# EAGLE board RADiuS-DSMA (EAGLE 7.7.0)
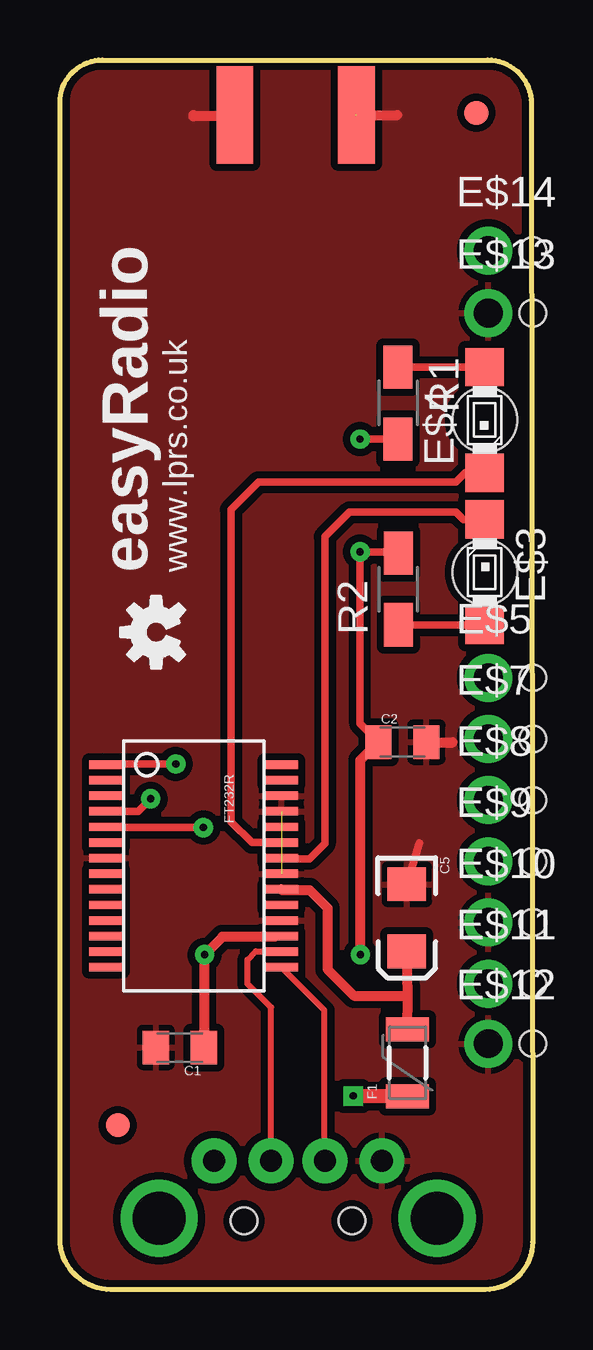
[diagram p0: board, top side]
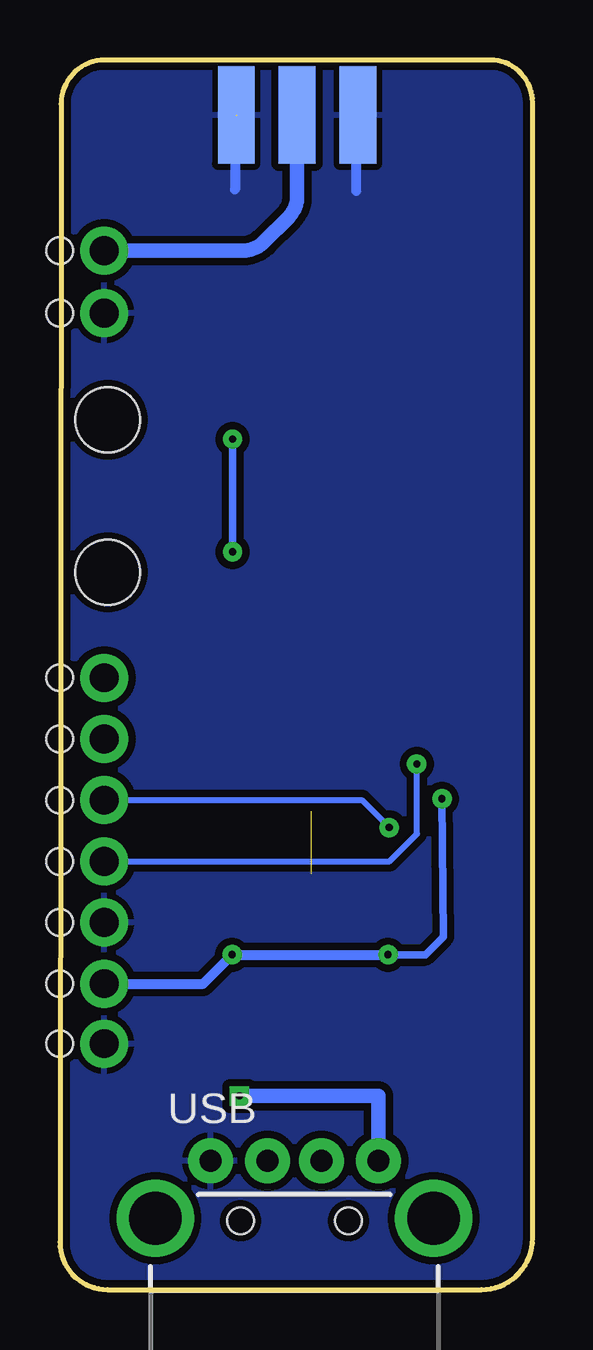
[diagram p1: board, bottom side, seen from below]

Size 19.71 x 51.25 mm. Coordinates in mm from the lower left corner, seen from the top.
Outline: 19.66,49.42 19.71,1.98 arc-90 17.73,0 2.13,0 arc-90 0,2.13 0,49.48 arc-90 1.77,51.25 17.84,51.25 arc-90 19.66,49.42
Copper layers (1*16): Top 0.035mm / dielectric 1.5mm / Bottom 0.035mm
Design rules "default *": minimum track width 8mil, minimum drill 20mil, track to track 8mil, track to pad 8mil, pad to pad 8mil, via to via 8mil, smd to smd 8mil, copper to edge 10mil, drill to drill 8mil, minimum pad ring 12mil, minimum via ring 10mil, stop-mask expansion 4mil, vias tented up to drill 0.3mm, thermal gap 10mil
Net classes: 0 default: width 0.203 mm; 1 power: width 0.254 mm
Holes 1.1 mm at 19.71,43.3 19.71,40.7 19.71,25.5 19.71,22.95 19.71,20.4 19.71,17.85 19.71,15.3 19.71,12.75 19.71,10.25

## Footprints (pad centres in the part's own frame; a part is rotated, then mirrored left to right if it is on the bottom)
C0805K = smd 1.1 x 1.4: 1 -1,0; 2 1,0
EIA3216 = smd 1.4 x 1.6: A 1.4,0; C -1.4,0
FIDUCIAL = smd 1 x 1: 1 0,0
MINI-TOPLED-SANTANA = smd 1.6 x 1.6: A 0,2.2; C 0,-2.2 | hole 2.7: 0,0
1X01-CLEANBIG = drill 1.2 pad 2: 1 0,0
PTC-1206 = smd 1 x 1.8: 1 -1.4,0; 2 1.4,0
SSOP28DB = smd 0.348 x 1.397: 1 -4.225,-3.656; 2 -3.575,-3.656; 3 -2.925,-3.656; 4 -2.275,-3.656; 5 -1.625,-3.656; 6 -0.975,-3.656; 7 -0.325,-3.656; 8 0.325,-3.656; 9 0.975,-3.656; 10 1.625,-3.656; 11 2.275,-3.656; 12 2.925,-3.656; 13 3.575,-3.656; 14 4.225,-3.656; 15 4.225,3.656; 16 3.575,3.656; 17 2.925,3.656; 18 2.275,3.656; 19 1.625,3.656; 20 0.975,3.656; 21 0.325,3.656; 22 -0.325,3.656; 23 -0.975,3.656; 24 -1.625,3.656; 25 -2.275,3.656; 26 -2.925,3.656; 27 -3.575,3.656; 28 -4.225,3.656
SMA-EDGE = smd 1.524 x 4.064: GND@0 0,0; GND@1 5.08,0; SIG 2.54,0 | smd 1.524 x 4.064 bottom: GND@2 0,0; GND@3 5.08,0
R1206W = smd 1.8 x 1.2: 1 -1.499,0; 2 1.499,0
USB-A-H = drill 0.914 pad 1.88: D+ 2.4,1.127; D- 2.4,-1.127; GND 2.4,3.5; VBUS 2.4,-3.5 | drill 2.2: GND2 0,-5.8; GND3 0,5.8 | hole 1.1: -0.1,2.25; -0.1,-2.25

## Placement (x,y rotation side)
C1  0.1uF  [C0805K]  5,10.09 180 top
C2  0.1uF  [C0805K]  14.28,22.82 0 top
C5  10uF  [EIA3216]  14.46,15.5 270 top
E$1  [FIDUCIAL]  2.41,6.85 0 top
E$3  [MINI-TOPLED-SANTANA]  17.71,29.9 180 top
E$4  [MINI-TOPLED-SANTANA]  17.71,36.25 0 top
E$5  [1X01-CLEANBIG]  17.86,25.5 0 top
E$6  [OSHW-LOGO-S]  4.01,27.4 90 top
E$7  [1X01-CLEANBIG]  17.86,22.95 0 top
E$8  [1X01-CLEANBIG]  17.86,20.4 0 top
E$9  [1X01-CLEANBIG]  17.86,17.85 0 top
E$10  [1X01-CLEANBIG]  17.86,15.3 0 top
E$11  [1X01-CLEANBIG]  17.86,12.75 0 top
E$12  [1X01-CLEANBIG]  17.86,10.25 0 top
E$13  [1X01-CLEANBIG]  17.86,40.7 0 top
E$14  [1X01-CLEANBIG]  17.86,43.3 0 top
E$15  [FIDUCIAL]  17.36,49.05 0 top
F1  500mA  [PTC-1206]  14.5,9.45 90 top
FT232R  FT232R  [SSOP28DB]  5.58,17.66 270 top
GND  [SMA-EDGE]  12.36,48.95 0 bottom
R1  330  [R1206W]  14.1,36.95 270 top
R2  330  [R1206W]  14.11,29.2 90 top
USB  USBSMD  [USB-A-H]  9.93,2.97 90 bottom

## Library data of the parts
C1 C2 = adafruit
C5 E$1 E$6 E$15 F1 FT232R GND USB = SparkFun
E$3 E$4 = led
E$5 E$7-E$14 = adafruit_4u
R1 R2 = ref-packages

## Nets
3.3V [power]: C1.1 C2.1 E$11.1 FT232R.4 FT232R.17 R1.2 R2.2
ANT: E$14.1 GND.SIG
GND [power]: C1.2 C2.2 C5.C E$10.1 E$12.1 E$13.1 FT232R.7 FT232R.18 FT232R.21 FT232R.25 FT232R.26 GND.GND@0 GND.GND@1 USB.GND
N$1: E$4.A R1.1
N$2: E$3.A R2.1
N$3: F1.1 USB.VBUS
RXD: E$8.1 FT232R.5
RXLED: E$3.C FT232R.22
S$2 [power]: C5.A F1.2 FT232R.20
TXD: E$9.1 FT232R.1
TXLED: E$4.C FT232R.23
USB_D+: FT232R.15 USB.D+
USB_D-: FT232R.16 USB.D-

## Tracks (layer width: path | path; a pad name or v marks a point on that pad's centre or on a via)
3.3V  (via drill 0.3)
  Top 0.305: FT232R.17 8.96,14.71 | FT232R.4 3.26,19.93 v3.78,20.46 | 13.23,22.71 C2.1 12.51,23.59 v12.51,30.75 14.06,30.75 R2.2 | 14.11,35.45 R1.2 13.16,35.45 v12.51,35.45
  Top 0.406: C1.1 6,13.98 v6.03,13.96 6.78,14.71 8.96,14.71 | v12.53,13.96 12.53,22.07 C2.1
  Bottom 0.305: v6.03,13.96 4.48,13.96 3.73,14.71 v3.78,20.46 | v12.51,35.45 v12.51,30.75
  Bottom 0.406: v6.03,13.96 v12.53,13.96 13.74,12.75 E$11.1
ANT
  Bottom 0.406: 9.81,48.05 9.91,48.15 9.91,48.86 GND.SIG
  Bottom 0.61: 9.81,48.05 9.81,45.58 arc45 10.19,44.68 11.19,43.67 arc45 12.09,43.3 E$14.1
GND  (2 unrouted)
  Top 0.305: 14.99,18.62 C5.C
  Top 0.406: 15.43,22.81 16.38,22.81 | 7.21,48.9 5.56,48.9 5.56,48.95 | 12.31,48.95 14.06,48.95
  Bottom 0.406: 7.36,48.2 7.36,45.8 | 12.46,47.8 12.41,47.8 12.41,45.85
  pour Bottom (isolate 0.305): 0.2,51.08 19.46,51.08 19.46,0.37 0.2,0.37
  pour Top (isolate 0.305): 0.15,51.13 19.51,51.23 19.51,0.14 0.2,0.14
N$1
  Top 0.305: R1.1 E$4.A
N$2
  Top 0.305: R2.1 E$3.A
N$3  (via drill 0.3)
  Top 0.61: F1.1 v12.23,8.07
  Bottom 0.61: v12.23,8.07 6.43,8.08 USB.VBUS
RXD  (via drill 0.3)
  Top 0.305: FT232R.5 1.7,19.26 v5.98,19.26
  Bottom 0.254: E$8.1 7.12,20.4 v5.98,19.26
RXLED
  Top 0.305: 9.01,17.96 FT232R.22 9.27,17.95 10.41,17.95 11.05,18.59 11.05,31.38 12.07,32.4 16.51,32.4 16.81,32.1 E$3.C
S$2
  Top 0.305: C5.A 15.05,13.78
  Top 0.406: F1.2 14.51,12.25 | 14.51,12.25 C5.A | FT232R.20 9.27,16.65 10.41,16.65 11.16,15.9 11.16,13.35 12.27,12.25 14.51,12.25
TXD  (via drill 0.3)
  Top 0.305: FT232R.1 1.75,21.91 v4.83,21.91
  Bottom 0.254: E$9.1 5.96,17.85 4.81,19 4.81,21.89 v4.83,21.91
TXLED
  Top 0.305: FT232R.23 8.01,18.63 7.13,19.48 7.13,32.51 8.27,33.65 16.51,33.65 16.91,34.05 E$4.C
USB_D+
  Top 0.254: 11.03,5.56 11.03,11.64 FT232R.15
  Top 0.305: FT232R.15 9.01,13.41 | 11.03,5.56 11.03,5.39 USB.D+
USB_D-
  Top 0.254: USB.D- 8.8,11.76 7.81,12.75 7.81,13.75 8.16,14.1 9.22,14.1 FT232R.16

## Text on the board
_tsilk: easyRadio | www.lprs.co.uk